# Altium PCB EBAZEXT.PcbDoc
Units mm, origin at the board's own origin, x right, y up, seen from the top; angles counter-clockwise.
Board outline 99.7 x 35.08 mm, 2 copper layers (Top Layer, Bottom Layer); 55 components, 80 nets, 300 pads, 19 vias.
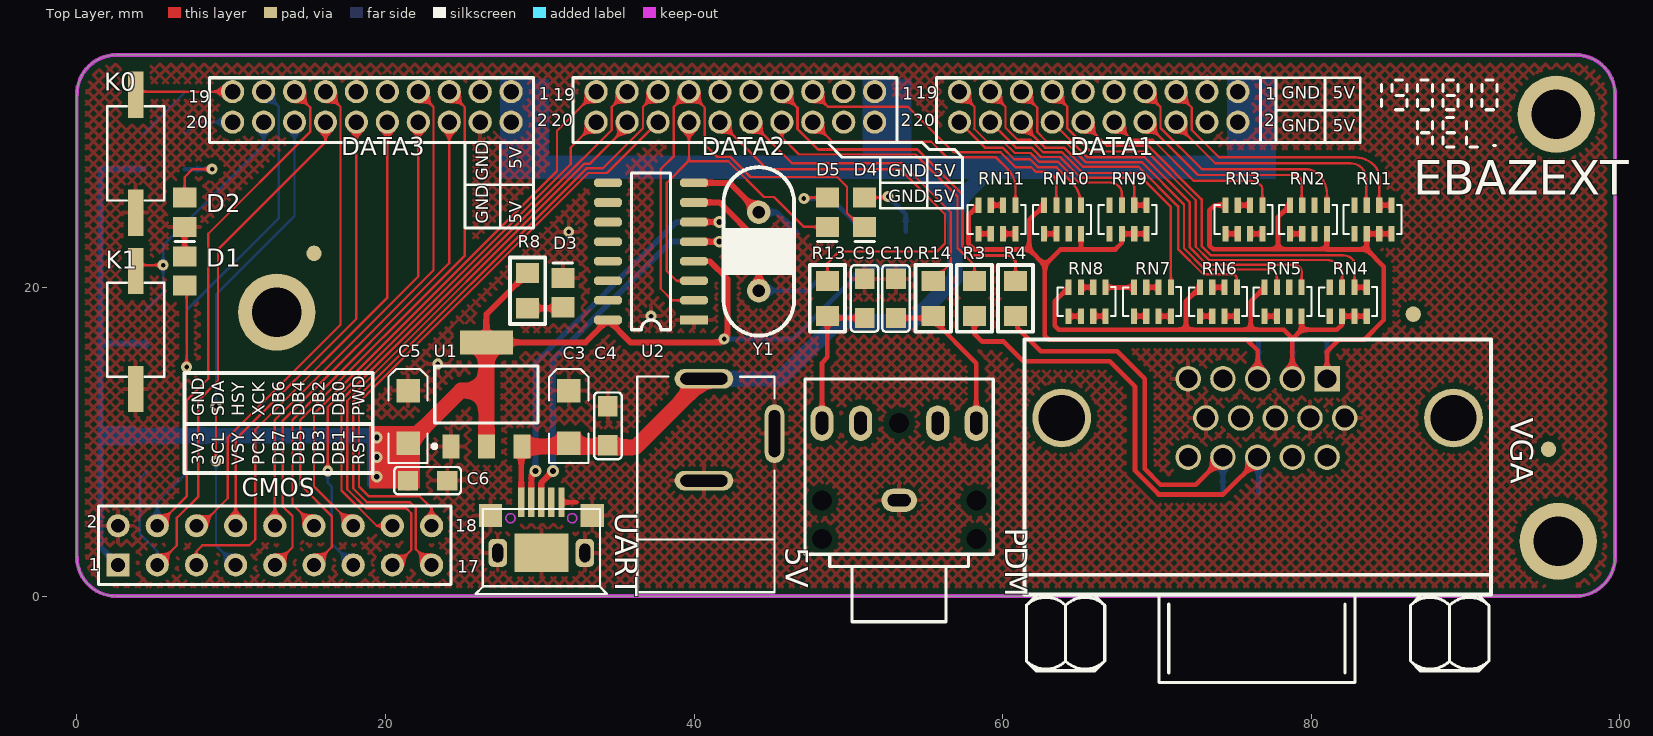
[diagram p0: Top Layer view]
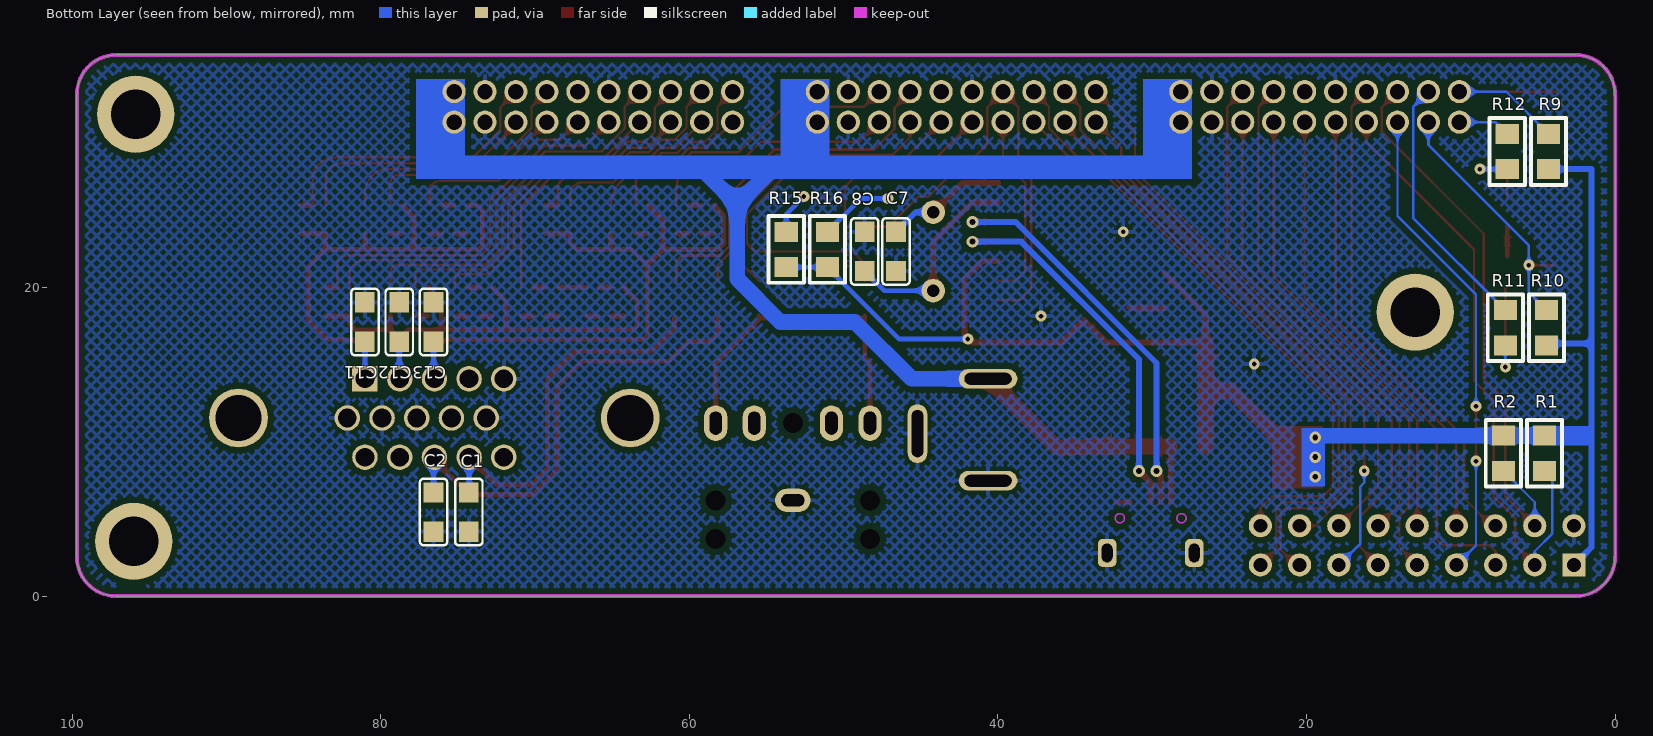
[diagram p1: Bottom Layer view, seen from below]
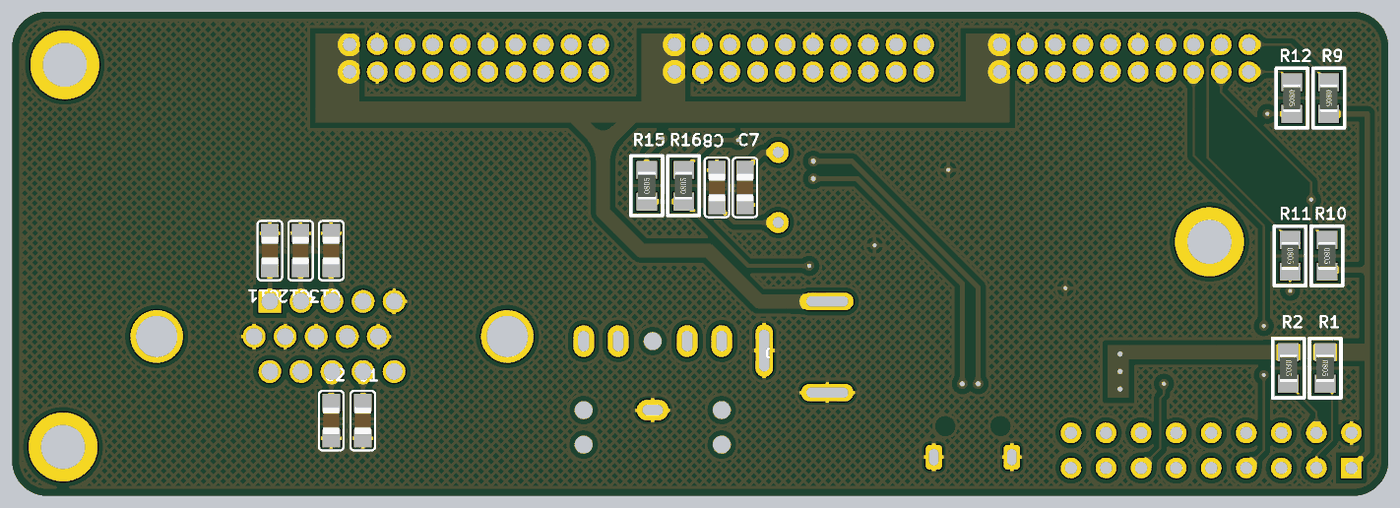
[diagram p2: 3D render of the assembled board from below, using the file's embedded part models]

## Layer stack, top to bottom
Top Solder: solder mask 0.0102, Solder Resist, Dk 3.5
Top Layer: signal copper 0.0356
Dielectric 1: dielectric 0.32, FR-4, Dk 4.8
Bottom Layer: signal copper 0.0356
Bottom Solder: solder mask 0.0102, Solder Resist, Dk 3.5

## Board outline
0,2.54 ccw(c2.534,2.546) 2.54,0.013 97.155,0.013 ccw(c97.161,2.546) 99.695,2.54 99.695,32.512 ccw(c97.137,32.53) 97.155,35.089 2.54,35.089 ccw(c2.565,32.524) 0,32.499

## Design rules (kind name [scope] priority, off if disabled: settings)
Clearance Clearance_inpolygon [InPolygon] p1: gap=0.381
Clearance [All] p2: gap=0.152
ComponentClearance [All] p1: gap=0 collisioncheckmode=3 verticalgap=0 showdistances=FALSE
DiffPairsRouting [All] p1: maxlimit=0.254 minlimit=0.254 mostfreqgap=0.254 toplayer_minwidth=0.305 toplayer_maxwidth=0.381 toplayer_prefwidth=0.381 bottomlayer_minwidth=0.305 bottomlayer_maxwidth=0.381 bottomlayer_prefwidth=0.381 maxuncoupledlength=12.7
PolygonConnect [All] p1: connectstyle=Relief reliefconductorwidth=0.254 reliefentries=4 polygonreliefangle="90 Angle" airgapwidth=0.254
RoutingVias [All] p1: holewidth=0.711 width=1.27 viastyle="Through Hole" minholewidth=0.711 minwidth=1.27 maxholewidth=0.711 maxwidth=1.27
SolderMaskExpansion [All] p1: expansion=0.102
Width [All] p1: maxlimit=1.27 minlimit=0.152 preferedwidth=0.305
28 further rules are at their usual default settings.

## Classes and differential pairs
net class VGAD[15..0]: VGAD0 VGAD1 VGAD2 VGAD3 VGAD4 VGAD5 VGAD6 VGAD7 VGAD8 VGAD9 VGAD10 VGAD11 VGAD12 VGAD13 VGAD14 VGAD15
differential pair USB: +USB_P -USB_N

## Components (designator, comment, footprint, x,y, rotation, side; value= is the part's Value field where it differs from the comment)
5V "DC005电源插座" POWER_CON_max 45.212,10.541 r180 top
C1 "Cap" 0805 74.295,4.318 r90 bottom
C2 "Cap" 0805 76.581,4.318 r90 bottom
C3 "106" 1206A 31.877,9.906 r90 top
C4 "104" 0805 34.417,12.192 r270 top
C5 "106" 1206A 21.463,9.906 r90 top
C6 "104" 0805 23.876,7.493 r180 top
C7 "22p" 0805 46.609,21.209 r90 bottom
C8 "22p" 0805 48.641,23.495 r270 bottom
C9 "104" 0805 51.054,20.447 r270 top
C10 "104" 0805 53.086,20.447 r270 top
C11 "5p1" 0805 81.026,18.923 r270 bottom
C12 "5p1" 0805 78.803,18.923 r270 bottom
C13 "5p1" 0805 76.581,18.923 r270 bottom
CMOS "CMOS" HDR2X9 2.667,2.032 r0 top
D1 "LED0" LED-0805 6.985,21.082 r90 top
D2 "LED0" LED-0805 6.985,24.892 r270 top
D3 "LED0" LED-0805 31.496,19.685 r90 top
D4 "LED0" LED-0805 51.054,24.892 r270 top
D5 "LED0" LED-0805 48.641,24.892 r270 top
DATA1 "PHD20" 37 75.25,32.709 r0 top
DATA2 "PHD20" 37 51.705,32.709 r0 top
DATA3 "PHD20" 37 28.143,32.709 r0 top
K0 "SW-PB" key_2 5.664,25.654 r90 top
K1 "SW-PB" key_2 5.664,14.224 r90 top
PDM "3F07" 3F07 53.293,6.223 r90 top (schematic designator PWM)
R1 "4.7K" R0805 4.572,9.271 r270 bottom
R2 "4.7K" R0805 7.239,9.271 r270 bottom
R3 "22" R0805 58.166,19.304 r270 top
R4 "22" R0805 60.833,19.304 r270 top
R8 "1k" R0805 29.21,19.812 r90 top
R9 "" R0805 4.318,28.829 r270 bottom
R10 "" R0805 4.445,17.399 r270 bottom
R11 "1k" R0805 7.112,17.399 r270 bottom
R12 "1k" R0805 6.985,28.829 r270 bottom
R13 "" R0805 48.641,19.304 r270 top
R14 "" R0805 55.499,19.304 r90 top
R15 "1k" R0805 53.721,22.479 r90 bottom
R16 "1k" R0805 51.054,22.479 r90 bottom
RN1 "1K" RN-8P 82.804,23.495 r90 top
RN2 "2K" RN-8P 78.619,23.495 r90 top
RN3 "2K" RN-8P 74.435,23.495 r90 top
RN4 "1K" RN-8P 81.204,18.161 r90 top
RN5 "2K" RN-8P 76.975,18.161 r90 top
RN6 "2K" RN-8P 72.784,18.161 r90 top
RN7 "2K" RN-8P 68.504,18.161 r90 top
RN8 "2K" RN-8P 64.275,18.161 r90 top
RN9 "1K" RN-8P 66.929,23.495 r90 top
RN10 "2K" RN-8P 62.681,23.495 r90 top
RN11 "2K" RN-8P 58.433,23.495 r90 top
U1 "ASM1117" SOT223 26.543,13.081 r0 top
U2 "CH340G" SOP16 40.005,17.907 r90 top
UART "USB-AB" "USB_AB - 5S - B" 30.099,0.66 r180 top
VGA "VGA" DB15-F 76.526,9.017 r270 top
Y1 "XTAL" X-HC-49S 44.196,22.352 r270 top

## Footprints (in the part's own frame and the unit in brackets; to place one, negate y for a bottom-side part, rotate by r counter-clockwise, add the part's x,y. Pads: shape width x height; smd on the part's side, far side on the other; paste and mask are expansions set on the pad)
3F07 [mm] "立体声耳机插座"
  oval 1.5x2.3 hole 0.8 slot 1.5 at 90 deg: 1(0,0)
  oval 2.3x1.5 hole 0.8 slot 1.5 at 0 deg: 2(5,5) 3(5,2.5) 4(5,-2.5) 5(5,-5)
  round 1 hole 1.3: S(-2.5,5) S(-2.5,-5) S(0,5) S(0,-5) S(5,0)
  silkscreen extent -7.87,-6.1 7.87,6.1, body extent -7.87,-5.97 7.87,5.97, height 6
37 [mm]
  round 1.5 hole 1: 1(0,0) 2(0,-1.975) 3(-2.006,0) 4(-2.006,-1.975) 5(-4.011,0) 6(-4.011,-1.975) 7(-6.017,0) 8(-6.017,-1.975) 9(-8.022,0) 10(-8.022,-1.975) 11(-10.028,0) 12(-10.028,-1.975) 13(-12.033,0) 14(-12.033,-1.975) 15(-14.039,0) 16(-14.039,-1.975) 17(-16.044,0) 18(-16.044,-1.975) 19(-18.05,0) 20(-18.05,-1.975)
  silkscreen extent -19.55,-3.3 1.45,0.9
0805 [mil]
  rect 52x50 smd: 1(-5,0) 2(95,0)
  silkscreen extent -40,-35 130,35, body extent 6,-24 84,24, height 37
1206A [mil]
  rect 60x60 smd: 1(0,0) 2(135,0)
  silkscreen extent -50,-50 190,50
DB15-F [mil] "VGA母座"
  rect 65x65 hole 48: 1(-200,177.16)
  round 65 hole 48: 2(-200,88.58) 3(-200,0) 4(-200,-88.58) 5(-200,-177.16) 6(-100,222.17) 7(-100,133.58) 8(-100,45) 9(-100,-43.58) 10(-100,-132.16) 11(0,177.16) 12(0,88.58) 13(0,0) 14(0,-88.58) 15(0,-177.16)
  round 150 hole 118.11: 16(-100,500) 17(-100,-500)
  silkscreen extent -300,-595 575,596
HDR2X9 [mm] "Connector; Header; 9x2 Position"
  rect 1.5x1.5 hole 0.9: 1(0,0)
  round 1.5 hole 0.9: 2(0,2.54) 3(2.54,0) 4(2.54,2.54) 5(5.08,0) 6(5.08,2.54) 7(7.62,0) 8(7.62,2.54) 9(10.16,0) 10(10.16,2.54) 11(12.7,0) 12(12.7,2.54) 13(15.24,0) 14(15.24,2.54) 15(17.78,0) 16(17.78,2.54) 17(20.32,0) 18(20.32,2.54)
  silkscreen extent -1.27,-1.27 21.59,3.81
key_2 [mm]
  rect 3x1 smd: 1(-0.787,1.854) 2(6.858,1.854)
  silkscreen extent 0,0 6.1,3.7, body extent -0.03,-0.05 6.12,3.73, height 2.5
LED-0805 [mm] "贴片LED"
  rect 1.3x1.5 smd: 1(-0.95,0) 2(0.95,0)
  silkscreen extent 1.91,-0.63 1.91,0.64
POWER_CON_max [mil]
  oval 50x150 hole 30 slot 120 at 90 deg: 1(0,0)
  oval 150x50 hole 30 slot 120 at 0 deg: 2(180,-140) 3(180,120)
  silkscreen extent 0,-146 350,405, body extent 0,-145 350,405, height 420
R0805 [mm]
  rect 1.3x1.5 smd: 1(-1.143,0) 2(1.143,0)
  silkscreen extent -2.16,-1.14 2.16,1.14, body extent -1,-0.63 1,0.63, height 0.55
RN-8P [mm]
  rect 1x0.4 smd: 1(0,0) 2(0,-0.8) 3(0,-1.6) 4(0,-2.4) 5(1.858,-2.4) 6(1.858,-1.6) 7(1.858,-0.8) 8(1.858,0)
  silkscreen extent 0,-3.05 1.88,0.71
SOP16 [mil]
  rect 22x72 smd: 1(0,0)
  oct 22x72 smd: 2(50,0) 3(100,0) 4(150,0) 5(200,0) 6(250,0) 7(300,0) 8(350,0) 9(350,220) 10(300,220) 11(250,220) 12(200,220) 13(150,220) 14(100,220) 15(50,220) 16(0,220)
  silkscreen extent -25,60 375,160
SOT223 [mm]
  rect 1.1x1.55 smd: 1(-2.3,-3.375) 2(0,-3.375) 3(2.3,-3.375)
  rect 3.45x1.55 smd: 4(0,3.375)
  silkscreen extent -3.5,-3.48 3.35,1.85, body extent -3.25,-3.48 3.25,3.48, height 1.7
"USB_AB - 5S - B" [mm]
  rect 0.4x1.9 smd: 1(1.3,-5.436) 2(0.65,-5.436) 3(0,-5.436) 4(-0.65,-5.436) 5(-1.3,-5.436)
  rrect50% 1.2x1.8 hole 0.7 slot 1.2 at 90 deg: 6(2.825,-2.15) 7(-2.825,-2.15)
  rect 1.5x1.5 smd: 8(-3.302,-4.572) 9(3.302,-4.572)
  rect 3.5x2.5 smd: 9(0,-2.159)
  Keep-Out Layer circle w0.102: c2,-4.4 r0.3
  Keep-Out Layer circle w0.102: c-2,-4.4 r0.3
  silkscreen extent -4.26,-5 4.26,0.51
X-HC-49S [mil] "插件晶振"
  round 60 hole 32: 1(-100,0) 2(100,0)
  silkscreen extent -215,-90 215,90

## Part data
5V: library part POWER_CON
C1 C2: "Capacitor"
C3 C5: library part CAP
C4 C6 C7 C8 C9 C10 C11 C12 C13: library part C_3
CMOS: library part "Header 9X2", "Header, 9-Pin, Dual row"
D1 D2 D3 D4 D5: "发光二极管"
DATA1 DATA2 DATA3: library part "Header 10X2", "Header, 10-Pin, Dual row"
K0 K1: "Switch"
PDM: "立体声耳机插座"
R1 R2 R3 R4 R8 R11 R12 R15 R16: library part RES, "Resistor"
R9 R10 R13 R14: library part Res1, "Resistor"
RN1 RN2 RN3 RN4 RN5 RN6 RN7 RN8 RN9 RN10 RN11: library part RN_Dup1
U1: "3.3V稳压芯片"
U2: "USB to TTL Serial / UART"
UART: "MicroUSB"
VGA: library part "D Connector 15"
Y1: "晶振"

## Free pads (board coordinates)
  round 5 hole 3.2: ""(12.954,18.415) ""(95.885,31.242) ""(96.012,3.556)
  round 1 smd: ""(15.367,22.225) ""(86.614,18.288) ""(95.377,9.525)

## Via types
v1: diameter 0.7, hole 0.3, Top Layer to Bottom Layer, tented both sides, 12 vias
v2: diameter 0.762, hole 0.381, Top Layer to Bottom Layer, tented both sides, 7 vias

## Nets (pads, with @x,y where several pads share a name; then routed paths per layer and width w, separated by ;. In a path a pad name is that pad's centre, name@x,y a point inside that pad or via, vN(x,y) a via of type N, cw(c..) or ccw(c..) an arc to the next point about the centre after c; other vN are vias at no path point)
3V3: C5.1 C6.2 CMOS.1 R1.1 R2.1 R8.2 R9.2 R10.2 R15.1 R16.1 U1.2 U1.4 U2.4 U2.16 | length 106.5
  Top Layer w0.381: R8.2 26.543,18.288 U1.4 32.966,16.456 U2.16 35.868,16.456 41.729,16.456 v1(41.946,16.673) 42.164,16.891 42.164,20.574 41.021,21.717 U2.4
  Top Layer w1.016: C6.2@21.463,7.366 C5.1 24.892,13.335 26.543,13.335 ; U1.2 26.543,13.335 ; U1.4 26.543,13.335
  Bottom Layer w0.305: v1(41.946,16.673) 46.391,16.673 R16.1 R15.1
  Bottom Layer w0.381: CMOS.1 1.524,3.175 1.524,16.383 ; R9.2 1.524,27.686 1.524,16.383 ; R10.2@4.445,16.383 1.524,16.383
  Bottom Layer w0.508: R10.2 R10.2@4.445,16.383
  Bottom Layer w1.016: 2.794,10.414 R1.1 R2.1 18.923,10.414
  other v2: 19.431,7.747 19.431,9.017 19.431,10.287
5V: 5V.2 C3.1 C4.2 DATA1.1 DATA1.2 DATA2.1 DATA2.2 DATA3.1 DATA3.2 U1.3 UART.1 | length 47.9
  Top Layer w0.381: UART.1 28.799,9.662 U1.3
  Top Layer w1.016: U1.3 34.363,9.706 34.417,9.652 36.195,9.652 5V.2
  Bottom Layer w1.016: 5V.2 45.593,14.097 49.276,17.78 54.102,17.78 56.896,20.574 56.896,25.4 ; 54.483,27.813 56.896,25.4 ; 59.309,27.813 56.896,25.4
AUDIO_L: DATA2.10 R14.2 | length 20.3
  Top Layer w0.152: DATA2.10 46.35,28.067 53.467,28.067 56.642,24.892 56.642,21.59 R14.2
AUDIO_R: DATA2.12 R13.1 | length 28.3
  Top Layer w0.152: DATA2.12 44.725,27.686 53.34,27.686 56.261,24.765 56.261,22.86 55.753,22.352 49.403,22.352 48.641,21.59 R13.1
BLUE: C13.2 RN9.2 RN9.3 RN9.4 RN10.4 RN10.8 RN11.8 VGA.3 | length 43.3
  Top Layer w0.305: RN11.8 57.785,24.705 57.785,22.86 58.166,22.479 61.722,22.479 ; RN10.8 61.722,24.394 61.722,22.479 ; RN10.4 65.081,22.536 65.024,22.479 ; RN9.4 RN9.3 RN9.2 67.729,22.898 67.31,22.479 65.024,22.479 ; VGA.3 76.526,15.93 75.819,16.637 62.992,16.637 62.738,16.891 62.738,21.463 ; 61.722,22.479 62.738,21.463 ; 62.738,21.463 63.754,22.479 65.024,22.479
  Bottom Layer w0.305: VGA.3@76.581,14.152 C13.2
CMOS_DB0: CMOS.16 DATA2.17 | length 37.8
  Top Layer w0.152: CMOS.16 19.431,4.572 17.145,6.858 17.145,12.723 32.768,28.346 32.791,28.346 34.671,30.226 34.671,31.719 DATA2.17
CMOS_DB1: CMOS.15 DATA2.18 | length 40.3
  Top Layer w0.152: CMOS.15 20.701,2.032 21.666,2.997 21.666,5.385 21.336,5.715 18.746,5.715 17.526,6.935 17.526,12.673 32.894,28.042 33.249,28.042 35.661,30.454 DATA2.18
CMOS_DB2: CMOS.14 DATA2.19 | length 36.8
  Top Layer w0.152: CMOS.14 15.367,7.112 15.367,11.811 31.115,27.559 31.115,30.169 DATA2.19
CMOS_DB3: CMOS.13 DATA2.20 | length 36.6
  Top Layer w0.152: v1(16.256,8.128) 16.256,12.265 32.004,28.013 32.004,29.083 DATA2.20
  Bottom Layer w0.152: v1(16.256,8.128) 16.256,7.366 16.51,7.112 16.51,3.429 CMOS.13
CMOS_DB4: CMOS.12 DATA3.6 | length 30.9
  Top Layer w0.152: CMOS.12 13.97,5.969 13.97,11.43 24.132,21.592 DATA3.6
CMOS_DB5: CMOS.11 DATA3.5 | length 36.8
  Top Layer w0.152: CMOS.11 16.51,3.175 16.51,5.207 14.478,7.239 14.478,11.43 25.146,22.098 25.146,31.695 DATA3.5
CMOS_DB6: CMOS.10 DATA3.8 | length 30
  Top Layer w0.152: CMOS.10 12.827,11.43 22.127,20.73 DATA3.8
CMOS_DB7: CMOS.9 DATA3.7 | length 35.9
  Top Layer w0.152: CMOS.9 13.97,3.175 13.97,5.207 13.335,5.842 13.335,11.353 23.114,21.132 23.114,31.722 DATA3.7
CMOS_HREF: CMOS.6 DATA3.13 | length 32.6
  Top Layer w0.152: CMOS.6 8.001,4.572 9.779,6.35 9.779,10.287 17.088,17.596 17.088,31.73 DATA3.13
CMOS_PCLK: CMOS.7 DATA3.16 | length 31.3
  Top Layer w0.152: v1(9.017,8.763) v1(9.017,12.319)
  Bottom Layer w0.152: v1(9.017,8.763) 9.017,3.302 CMOS.7 ; v1(9.017,12.319) 9.017,19.558 14.104,24.645 DATA3.16
CMOS_PWDN: CMOS.18 DATA2.16 | length 38.8
  Top Layer w0.152: CMOS.18 22.987,5.715 22.225,6.477 18.923,6.477 18.288,7.112 18.288,12.573 33.147,27.432 34.364,27.432 DATA2.16
CMOS_RST: CMOS.17 DATA2.15 | length 43.2
  Top Layer w0.152: CMOS.17 21.971,3.048 21.971,5.715 21.59,6.096 18.796,6.096 17.907,6.985 17.907,12.623 33.021,27.737 34.087,27.737 36.688,30.338 36.688,31.73 DATA2.15
CMOS_SCLK: CMOS.3 DATA3.14 R1.2 | length 40
  Top Layer w0.152: CMOS.3 6.477,3.302 6.477,5.08 7.874,6.477 7.874,12.7 9.144,13.97 9.144,22.479 16.11,29.445 DATA3.14
  Bottom Layer w0.152: R1.2 4.064,7.62 4.064,4.064 5.207,2.921 CMOS.3
CMOS_SDAT: CMOS.4 DATA3.15 R2.2 | length 37.1
  Top Layer w0.152: CMOS.4 7.112,6.477 7.112,12.7 8.509,14.097 8.509,23.495 15.113,30.099 15.113,31.7 DATA3.15
  Bottom Layer w0.152: CMOS.4 5.207,6.096 R2.2
CMOS_VSYNC: CMOS.5 DATA3.10 | length 35.6
  Top Layer w0.152: CMOS.5 7.747,2.921 8.128,3.302 11.176,3.302 11.557,3.683 11.557,10.795 20.121,19.359 DATA3.10
CMOS_XCLK: CMOS.8 DATA3.12 | length 29.4
  Top Layer w0.152: CMOS.8 10.287,10.16 18.115,17.988 DATA3.12
GND: 5V.1 5V.3 C1.1 C2.1 C3.2 C4.1 C5.2 C6.1 C7.1 C8.1 C9.1 C10.1 C11.1 C12.1 C13.1 CMOS.2 D1.2 D2.2 D3.2 DATA1.3 DATA1.4 DATA1.11 DATA2.3 DATA2.4 DATA2.11 DATA3.3 DATA3.4 DATA3.11 K0.1 K1.1 PDM.1 U1.1 U2.1 UART.5 UART.6 UART.7 UART.8 UART.9 VGA.5 VGA.6 VGA.7 VGA.8 VGA.10 | length 2.9
  Top Layer w0.305: D1.2 D2.2 ; UART.5 32.385,6.096
  other v1: 23.392,15.053 37.211,18.161 31.877,23.622
GREEN: C12.2 RN4.2 RN4.3 RN4.4 RN5.4 RN5.8 RN6.8 RN8.8 VGA.2 | length 36.5
  Top Layer w0.305: RN8.8 63.373,19.117 63.373,17.526 63.627,17.272 71.882,17.272 ; RN6.8 71.882,19.117 71.882,17.272 ; RN5.8 76.073,19.117 76.073,17.272 ; VGA.2 78.776,16.728 ; RN5.4 79.375,17.272 ; RN4.4 RN4.3 RN4.2 82.004,17.615 81.661,17.272 79.375,17.272 ; 71.882,17.272 76.073,17.272 ; 76.073,17.272 78.232,17.272 78.776,16.728 ; 78.776,16.728 78.831,16.728 79.375,17.272
  Bottom Layer w0.305: VGA.2@78.803,14.124 C12.2
NetC1_2: C1.2 R4.2 VGA.14 | length 24.6
  Top Layer w0.305: R4.2@60.96,18.034 60.96,17.399 62.484,15.875 67.437,15.875 69.215,14.097 69.215,8.255 70.231,7.239 72.517,7.239 VGA.14@74.285,9.007
  Bottom Layer w0.305: C1.2@74.276,6.75 VGA.14
NetC2_2: C2.2 R3.2 VGA.13 | length 30.2
  Top Layer w0.305: R3.2@58.166,18.034 58.166,17.018 58.674,16.51 60.071,16.51 61.341,15.24 66.929,15.24 68.58,13.589 68.58,8.128 70.104,6.604 74.295,6.604 VGA.13@76.617,8.926
  Bottom Layer w0.305: C2.2 VGA.13@76.581,8.962
NetC7_2: C7.2 U2.8 Y1.1 | length 7.9
  Top Layer w0.381: U2.8 42.291,26.797 Y1.1
  Bottom Layer w0.381: Y1.1 45.339,24.892 C7.2
NetC8_2: C8.2 U2.7 Y1.2 | length 13.4
  Top Layer w0.381: U2.7 41.656,25.527 44.196,22.987 Y1.2
  Bottom Layer w0.305: Y1.2 47.371,19.812 C8.2
NetC9_2: C9.2 PDM.2 R13.2 | length 9
  Top Layer w0.305: PDM.2@48.293,11.731 48.293,15.146 48.641,15.494 R13.2 48.768,18.034 C9.2
NetC10_2: C10.2 PDM.5 R14.1 | length 10.1
  Top Layer w0.305: C10.2 55.372,18.034 R14.1 55.499,17.907 58.293,15.113 PDM.5@58.293,11.731
NetD1_1: D1.1 R11.2 | length 6.5
  Top Layer w0.152: v1(7.112,14.859) D1.1@7.112,20.005
  Bottom Layer w0.152: v1(7.112,14.859) R11.2
NetD2_1: D2.1 R12.2 | length 5.1
  Top Layer w0.152: D2.1 6.985,27.178 7.493,27.686 v1(8.763,27.686)
  Bottom Layer w0.305: R12.2 v1(8.763,27.686)
NetD3_1: D3.1 R8.1 | length 2.3
  Top Layer w0.381: R8.1 31.43,18.669 D3.1
NetD4_1: D4.1 R15.2 | length 4.3
  Top Layer w0.152: D4.1 52.512,25.842 v1(52.578,25.908)
  Bottom Layer w0.305: v1(52.578,25.908) 53.721,24.765 R15.2
NetD5_1: D5.1 R16.2 | length 6.4
  Top Layer w0.152: v1(47.117,25.781) 47.178,25.842 D5.1
  Bottom Layer w0.305: v1(47.117,25.781) 48.895,25.781 R16.2
NetRN2_1: RN2.1 RN2.2 | length 0.8
  Top Layer w0.305: RN2.1 RN2.2
NetRN3_1: RN3.1 RN3.2 | length 0.8
  Top Layer w0.305: RN3.1 RN3.2
NetRN3_3: RN3.3 RN3.4 | length 0.8
  Top Layer w0.305: RN3.3 RN3.4
NetRN3_6: RN3.6 RN3.7 | length 0.8
  Top Layer w0.305: RN3.7@75.235,25.353 RN3.6@76.035,25.353
NetRN5_1: RN5.1 RN5.2 | length 0.8
  Top Layer w0.305: RN5.1 RN5.2
NetRN6_1: RN6.1 RN6.2 | length 0.8
  Top Layer w0.305: RN6.1 RN6.2
NetRN6_3: RN6.3 RN6.4 | length 0.8
  Top Layer w0.305: RN6.3 RN6.4
NetRN6_6: RN6.6 RN6.7 | length 0.8
  Top Layer w0.305: RN6.7 RN6.6
NetRN7_1: RN7.1 RN7.2 | length 0.8
  Top Layer w0.305: RN7.1 RN7.2
NetRN7_3: RN7.3 RN7.4 | length 0.8
  Top Layer w0.305: RN7.3 RN7.4
NetRN7_6: RN7.6 RN7.7 | length 0.8
  Top Layer w0.305: RN7.7 RN7.6
NetRN7_8: RN7.8 RN8.5 | length 1.8
  Top Layer w0.305: RN8.5@66.675,20.019 RN7.8
NetRN8_1: RN8.1 RN8.2 | length 0.8
  Top Layer w0.305: RN8.1 RN8.2
NetRN8_3: RN8.3 RN8.4 | length 0.8
  Top Layer w0.305: RN8.3 RN8.4
NetRN8_6: RN8.6 RN8.7 | length 0.8
  Top Layer w0.305: RN8.7 RN8.6
NetRN10_1: RN10.1 RN10.2 | length 0.8
  Top Layer w0.305: RN10.1 RN10.2
NetRN11_1: RN11.1 RN11.2 | length 0.8
  Top Layer w0.305: RN11.1 RN11.2
NetRN11_3: RN11.3 RN11.4 | length 0.8
  Top Layer w0.305: RN11.3 RN11.4
NetRN11_6: RN11.6 RN11.7 | length 0.8
  Top Layer w0.305: RN11.7 RN11.6
PL_KEY0: DATA3.19 K0.2 R9.1 | length 13.2
  Top Layer w0.152: K0.2@3.81,32.709 DATA3.19
  Bottom Layer w0.152: R9.1 7.055,32.709 DATA3.19
PL_KEY1: DATA3.18 K1.2 R10.1 | length 17
  Top Layer w0.152: K1.2@3.937,21.463 v1(5.588,21.463)
  Bottom Layer w0.178: R10.1 5.588,19.685 v1(5.588,21.463) 5.588,22.733 12.099,29.244 DATA3.18
PL_LED0: DATA3.17 R11.1 | length 17.1
  Bottom Layer w0.178: R11.1 13.09,24.52 13.09,31.718 DATA3.17
PL_LED1: DATA3.20 R12.1 | length 3.4
  Bottom Layer w0.152: R12.1 7.747,30.734 DATA3.20
RED: C11.2 RN1.2 RN1.3 RN1.4 RN2.4 RN2.8 RN3.8 VGA.1 | length 34.3
  Top Layer w0.305: RN3.8@74.435,25.353 73.74,25.353 73.406,25.019 73.406,22.733 73.654,22.485 77.851,22.485 ; RN2.8 77.851,24.585 77.851,22.485 ; RN2.4 81.02,22.485 ; VGA.1 81.026,15.875 81.788,16.637 83.439,16.637 84.709,17.907 84.709,21.374 83.604,22.479 ; RN1.4 RN1.3 RN1.2 83.604,22.479 ; 77.851,22.485 81.02,22.485 ; 81.02,22.485 81.026,22.479 83.604,22.479
  Bottom Layer w0.305: VGA.1 C11.2
RXD: D5.2 DATA2.14 U2.3 | length 23
  Top Layer w0.152: DATA2.14 39.672,28.242 ; U2.3 38.862,20.447 38.227,21.082 38.227,26.797 39.672,28.242 ; D5.2 47.127,23.942 45.187,25.883 44.523,25.883 42.212,28.194 39.719,28.194 39.672,28.242
TXD: D4.2 DATA2.13 U2.2 | length 33.2
  Top Layer w0.152: U2.2 38.608,19.177 37.846,19.939 37.846,27.686 38.693,28.533 38.693,31.73 DATA2.13 40.699,31.682 40.699,29.278 41.478,28.499 42.338,28.499 43.659,27.178 49.276,27.178 49.911,26.543 49.911,24.831 D4.2@50.8,23.942
USB_N: U2.6 UART.2 | length 26.5
  Top Layer w0.381: UART.2 29.449,7.859 v2(29.718,8.128) ; U2.6 v2(41.656,24.257)
  Bottom Layer w0.381: v2(29.718,8.128) 29.718,15.122 38.853,24.257 40.005,24.257 v2(41.656,24.257)
USB_P: U2.5 UART.3 | length 25.2
  Top Layer w0.381: UART.3 30.099,7.366 v2(30.861,8.128) ; U2.5 v2(41.656,22.987)
  Bottom Layer w0.381: v2(30.861,8.128) 30.861,15.367 38.481,22.987 v2(41.656,22.987)
VGA_HS: DATA2.8 R3.1 | length 19.9
  Top Layer w0.152: DATA2.8 45.688,29.75 46.799,28.639 54.351,28.639 57.074,25.916 57.074,22.565 58.166,21.473 R3.1
VGA_VS: DATA2.7 R4.1 | length 23.8
  Top Layer w0.178: DATA2.7 45.688,32.671 46.703,31.656 46.703,30.29 48.037,28.956 54.483,28.956 57.391,26.048 57.391,22.697 58.003,22.085 60.465,22.085 60.833,21.717 R4.1
VGAD0: DATA2.6 RN11.5 | length 16.4
  Top Layer w0.152: DATA2.6 48.964,29.464 55.372,29.464 56.388,28.448 59.563,28.448 60.325,27.686 cw(c59.099,26.46) 60.833,26.46 RN11.5
VGAD1: DATA2.5 RN10.7 | length 19.8
  Top Layer w0.152: DATA2.5 48.672,31.73 53.868,31.73 56.82,28.778 59.868,28.778 60.833,27.813 61.853,27.813 62.158,27.508 62.755,27.508 cw(c62.755,26.814) 63.246,27.305 63.288,27.263 cw(c62.822,26.797) 63.481,26.797 RN10.7
VGAD2: DATA1.20 RN10.5 | length 10.5
  Top Layer w0.152: DATA1.20 58.851,29.083 59.995,29.083 60.757,28.321 61.776,28.321 62.284,27.813 63.5,27.813 64.459,26.854 cw(c62.959,25.353) RN10.5
VGAD3: DATA1.19 RN9.7 | length 15
  Top Layer w0.152: DATA1.19 58.179,31.73 58.179,30.316 58.166,30.303 59.005,29.464 60.045,29.464 60.78,28.729 61.799,28.729 62.359,28.169 63.591,28.169 64.937,26.822 66.929,26.822 cw(c66.929,25.964) 67.536,26.571 cw(c67.07,26.105) 67.729,26.105 RN9.7
VGAD4: DATA1.18 RN9.5 RN9.6 | length 13.1
  Top Layer w0.152: DATA1.18 60.857,29.083 61.876,29.083 62.485,28.473 63.717,28.473 65.064,27.127 67.835,27.127 cw(c67.835,26.433) 68.326,26.924 cw(c67.836,26.434) 68.529,26.434 RN9.6
  Top Layer w0.305: RN9.6 RN9.5
VGAD5: DATA1.17 RN7.5 | length 20.8
  Top Layer w0.152: DATA1.17 60.184,31.73 60.184,30.367 60.96,29.591 61.799,29.591 62.612,28.778 63.844,28.778 65.19,27.432 68.707,27.432 70.904,25.235 RN7.5
VGAD6: DATA1.16 RN6.5 | length 20.4
  Top Layer w0.152: DATA1.16@61.214,30.607 62.738,29.083 63.97,29.083 65.215,27.838 68.809,27.838 71.374,25.273 71.374,22.502 72.997,20.879 75.006,20.879 75.057,20.828 cw(c74.75,20.521) 75.184,20.521 RN6.5
VGAD7: DATA1.15 RN5.7 | length 24.9
  Top Layer w0.152: DATA1.15 62.238,31.682 62.238,30.091 62.865,29.464 64.056,29.464 65.376,28.143 69.012,28.143 71.755,25.4 71.755,22.552 73.123,21.184 77.352,21.184 cw(c77.352,20.837) 77.597,21.082 cw(c77.167,20.652) 77.775,20.652 RN5.7
VGAD8: DATA1.14 RN5.5 | length 23
  Top Layer w0.152: DATA1.14 65.503,28.448 69.215,28.448 72.136,25.527 72.136,22.602 73.25,21.488 78.88,21.488 cw(c78.88,20.968) 79.248,21.336 cw(c78.941,21.029) 79.375,21.029 RN5.5
VGAD9: DATA1.13 RN4.7 | length 27.1
  Top Layer w0.152: DATA1.13 64.195,31.73 64.195,30.329 65.695,28.829 69.363,28.829 72.517,25.675 72.517,22.652 73.376,21.793 80.991,21.793 cw(c80.991,20.666) 81.788,21.463 cw(c81.267,20.942) 82.004,20.942 ; RN4.7 82.004,20.815
VGAD10: DATA1.12 RN4.5 RN4.6 | length 25.4
  Top Layer w0.152: DATA1.12 66.746,29.21 69.413,29.21 72.898,25.725 72.898,22.702 73.502,22.098 82.064,22.098 cw(c82.064,21.231) 82.677,21.844 cw(c82.37,21.537) 82.804,21.537 RN4.6@82.804,20.146
  Top Layer w0.305: RN4.6 RN4.5
VGAD11: DATA1.10 RN3.5 | length 12.9
  Top Layer w0.152: DATA1.10@67.228,30.308 DATA1.10 68.371,29.591 69.723,29.591 72.39,26.924 76.095,26.924 cw(c76.095,26.057) 76.708,26.67 cw(c76.401,26.363) 76.835,26.363 RN3.5
VGAD12: DATA1.8 RN2.7 | length 13.3
  Top Layer w0.152: DATA1.8 72.662,27.305 78.867,27.305 cw(c78.867,26.797) 79.375,26.797 79.375,25.398 ccw(c79.419,25.398) RN2.7
VGAD13: DATA1.7 RN2.5 | length 16.3
  Top Layer w0.152: DATA1.7 70.231,31.711 70.231,30.358 72.903,27.686 79.598,27.686 cw(c79.598,26.385) 80.518,27.305 cw(c79.307,26.094) 81.019,26.094 RN2.5
VGAD14: DATA1.6 RN1.7 | length 15.8
  Top Layer w0.152: DATA1.6 71.239,30.607 73.779,28.067 82.55,28.067 cw(c82.55,27.051) 83.566,27.051 83.566,25.391 ccw(c83.604,25.391) RN1.7
VGAD15: DATA1.5 RN1.5 RN1.6 | length 19.1
  Top Layer w0.152: DATA1.5 72.263,31.685 72.263,30.226 74.041,28.448 82.848,28.448 cw(c82.848,26.714) 84.074,27.94 cw(c83.277,27.143) 84.404,27.143 RN1.6
  Top Layer w0.305: RN1.6 RN1.5
pads on no net: DATA1.9 DATA2.9 DATA3.9 PDM.3 PDM.4 PDM.S RN1.1 RN1.8 RN2.3 RN2.6 RN4.1 RN4.8 RN5.3 RN5.6 RN9.1 RN9.8 RN10.3 RN10.6 U2.9 U2.10 U2.11 U2.12 U2.13 U2.14 U2.15 UART.4 VGA.4 VGA.9 VGA.11 VGA.12 VGA.15 VGA.16 VGA.17

## Polygon pours and split planes (outlines as drawn)
GND on Bottom Layer "GND_L02_P036" (hatched 45Degree grid 0.508 track 0.203, remove dead copper, pour order 36): -0.254,33.274 1.397,34.925 1.524,34.925 96.774,34.925 97.155,35.306 98.425,34.036 99.441,34.036 99.441,2.159 99.314,2.032 97.917,0.635 97.917,0 1.524,0 1.397,-0.127 0.127,1.143 -0.127,1.143
GND on Top Layer "GND_L01_P038" (hatched 45Degree grid 0.508 track 0.203, remove dead copper, pour order 38): -0.127,32.766 -0.127,33.274 1.651,35.052 1.778,34.925 98.044,34.925 98.044,34.798 99.949,32.893 99.568,32.512 99.568,2.032 99.568,1.651 97.917,0 97.79,-0.127 1.905,-0.127 1.651,-0.127 -0.127,1.651

## Keep-outs
Keep-Out Layer:
  the board outline again, w0.254

## Other copper
Top Layer:
  rectangle net 3V3: 18.923,6.985 22.225,11.049
Bottom Layer:
  rectangle net 3V3: 1.524,9.779 3.81,11.049
  rectangle net 3V3: 18.796,7.112 20.32,10.922
  rectangle net 5V: 30.226,27.051 77.724,28.575
  rectangle net 5V: 74.549,27.051 77.724,33.528
  rectangle net 5V: 50.927,27.051 54.102,33.528
  rectangle net 5V: 27.432,27.051 30.607,33.528

## Silkscreen, mask and mechanical layers (free items; w line width, h text height)
Top Overlay:
  lines w0.178: 25.146,26.67 29.591,26.67 29.591,33.609 29.591,31.822 ; 25.146,29.409 25.146,23.876 29.591,23.876 29.591,29.409 29.593,29.409 ; 27.432,23.876 27.432,29.282 ; 48.641,29.409 49.602,28.448 52.07,28.448 ; 52.07,26.797 57.404,26.797 ; 53.155,29.409 54.792,29.409 55.245,28.956 56.896,28.956 57.404,28.448 ; 55.118,25.146 55.118,28.448 ; 76.7,29.409 83.185,29.409 83.185,33.609 76.7,33.609 ; 77.724,29.409 77.724,33.609 ; 77.724,31.509 83.185,31.509 ; 80.899,29.409 80.899,33.609 ; 52.07,28.448 57.404,28.448 ; 52.07,28.448 52.07,25.146 57.404,25.146 57.404,28.448
  lines w0.2: 84.554,31.733 84.554,32.183 ; 84.554,32.708 84.554,33.183 ; 85.23,32.708 85.23,33.183 ; 85.48,31.533 85.955,31.533 ; 85.48,33.458 85.93,33.458 ; 85.505,32.458 85.98,32.458 ; 86.205,31.733 86.205,32.183 ; 86.205,32.708 86.205,33.183 ; 86.881,29.32 86.881,29.77 ; 86.881,30.295 86.881,30.77 ; 86.881,31.733 86.881,32.183 ; 86.881,32.708 86.881,33.183 ; 87.131,31.533 87.606,31.533 ; 87.131,33.458 87.581,33.458 ; 87.156,30.045 87.631,30.045 ; 87.856,29.32 87.856,29.77 ; 87.856,30.295 87.856,30.77 ; 87.856,31.733 87.856,32.183 ; 87.856,32.708 87.856,33.183 ; 88.532,29.32 88.532,29.77 ; 88.532,30.295 88.532,30.77 ; 88.532,31.733 88.532,32.183 ; 88.532,32.708 88.532,33.183 ; 88.782,29.12 89.257,29.12 ; 88.782,31.045 89.232,31.045 ; 88.782,31.533 89.257,31.533 ; 88.782,33.458 89.232,33.458 ; 88.807,30.045 89.282,30.045 ; 88.807,32.458 89.282,32.458 ; 89.507,31.733 89.507,32.183 ; 89.507,32.708 89.507,33.183 ; 90.056,29.32 90.056,29.77 ; 90.056,30.295 90.056,30.77 ; 90.306,29.12 90.781,29.12 ; 90.396,31.733 90.396,32.183 ; 90.396,32.708 90.396,33.183 ; 91.072,31.733 91.072,32.183 ; 91.072,32.708 91.072,33.183 ; 91.322,31.533 91.797,31.533 ; 91.322,33.458 91.772,33.458 ; 91.821,29.21 91.948,29.21 ; 92.047,31.733 92.047,32.183 ; 92.047,32.708 92.047,33.183
  lines w0.254: 6.985,11.176 19.177,11.176 ; 6.985,8.001 6.985,14.478 19.177,14.478 19.177,8.001 6.985,8.001
  text "GND" at 78.105,32.258 h0.81
  text "5V" at 81.407,32.258 h0.81
  text "GND" at 78.105,30.099 h0.81
  text "5V" at 81.407,30.099 h0.81
  text "5V" at 28.829,27.686 h0.81 r90
  text "GND" at 52.578,27.178 h0.81
  text "5V" at 55.499,27.178 h0.81
  text "GND" at 26.67,26.924 h0.81 r90
  text "GND" at 52.578,25.527 h0.81
  text "5V" at 55.499,25.527 h0.81
  text "EBAZEXT" at 86.614,25.273 h3.81
  text "GND" at 26.67,24.13 h0.81 r90
  text "5V" at 28.829,24.13 h0.81 r90
  text "GND" at 8.255,11.684 h0.81 r90
  text "SDA" at 9.557,11.684 h0.81 r90
  text "HSY" at 10.858,11.684 h0.81 r90
  text "XCK" at 12.16,11.684 h0.81 r90
  text "DB6" at 13.462,11.684 h0.81 r90
  text "DB4" at 14.764,11.684 h0.81 r90
  text "DB2" at 16.066,11.684 h0.81 r90
  text "DB0" at 17.367,11.684 h0.81 r90
  text "PWD" at 18.669,11.684 h0.81 r90
  text "3V3" at 8.255,8.509 h0.81 r90
  text "SCL" at 9.557,8.509 h0.81 r90
  text "VSY" at 10.858,8.509 h0.81 r90
  text "PCK" at 12.16,8.509 h0.81 r90
  text "DB7" at 13.462,8.509 h0.81 r90
  text "DB5" at 14.764,8.509 h0.81 r90
  text "DB3" at 16.066,8.509 h0.81 r90
  text "DB1" at 17.367,8.509 h0.81 r90
  text "RST" at 18.669,8.509 h0.81 r90

## Text inside footprints (layer, text, board x,y; h text height)
CMOS: Top Overlay "2" at 0.635,4.445 h0.81; Top Overlay "1" at 0.762,1.651 h0.81; Top Overlay "17" at 24.638,1.524 h0.81; Top Overlay "18" at 24.511,4.191 h0.81
DATA1: Top Overlay "20" at 54.2,30.461 h0.81; Top Overlay "19" at 54.356,32.258 h0.81; Top Overlay "2" at 76.95,30.459 h0.81; Top Overlay "1" at 77.025,32.184 h0.81
DATA2: Top Overlay "20" at 30.734,30.48 h0.81; Top Overlay "19" at 30.861,32.131 h0.81; Top Overlay "2" at 53.405,30.459 h0.81; Top Overlay "1" at 53.48,32.184 h0.81
DATA3: Top Overlay "20" at 7.093,30.334 h0.81; Top Overlay "19" at 7.218,31.984 h0.81; Top Overlay "2" at 29.843,30.459 h0.81; Top Overlay "1" at 29.918,32.184 h0.81